# Altium PCB COMS0009_Coms_Test_Board.PcbDoc
Units mil, origin at the board's own origin, x right, y up, seen from the top; angles counter-clockwise.
Board outline 3543.31 x 3543.31 mil, 2 copper layers (Top Layer, Bottom Layer); 70 components, 93 nets, 342 pads, 87 vias.
Unrouted connection lines stored in the file: 3.
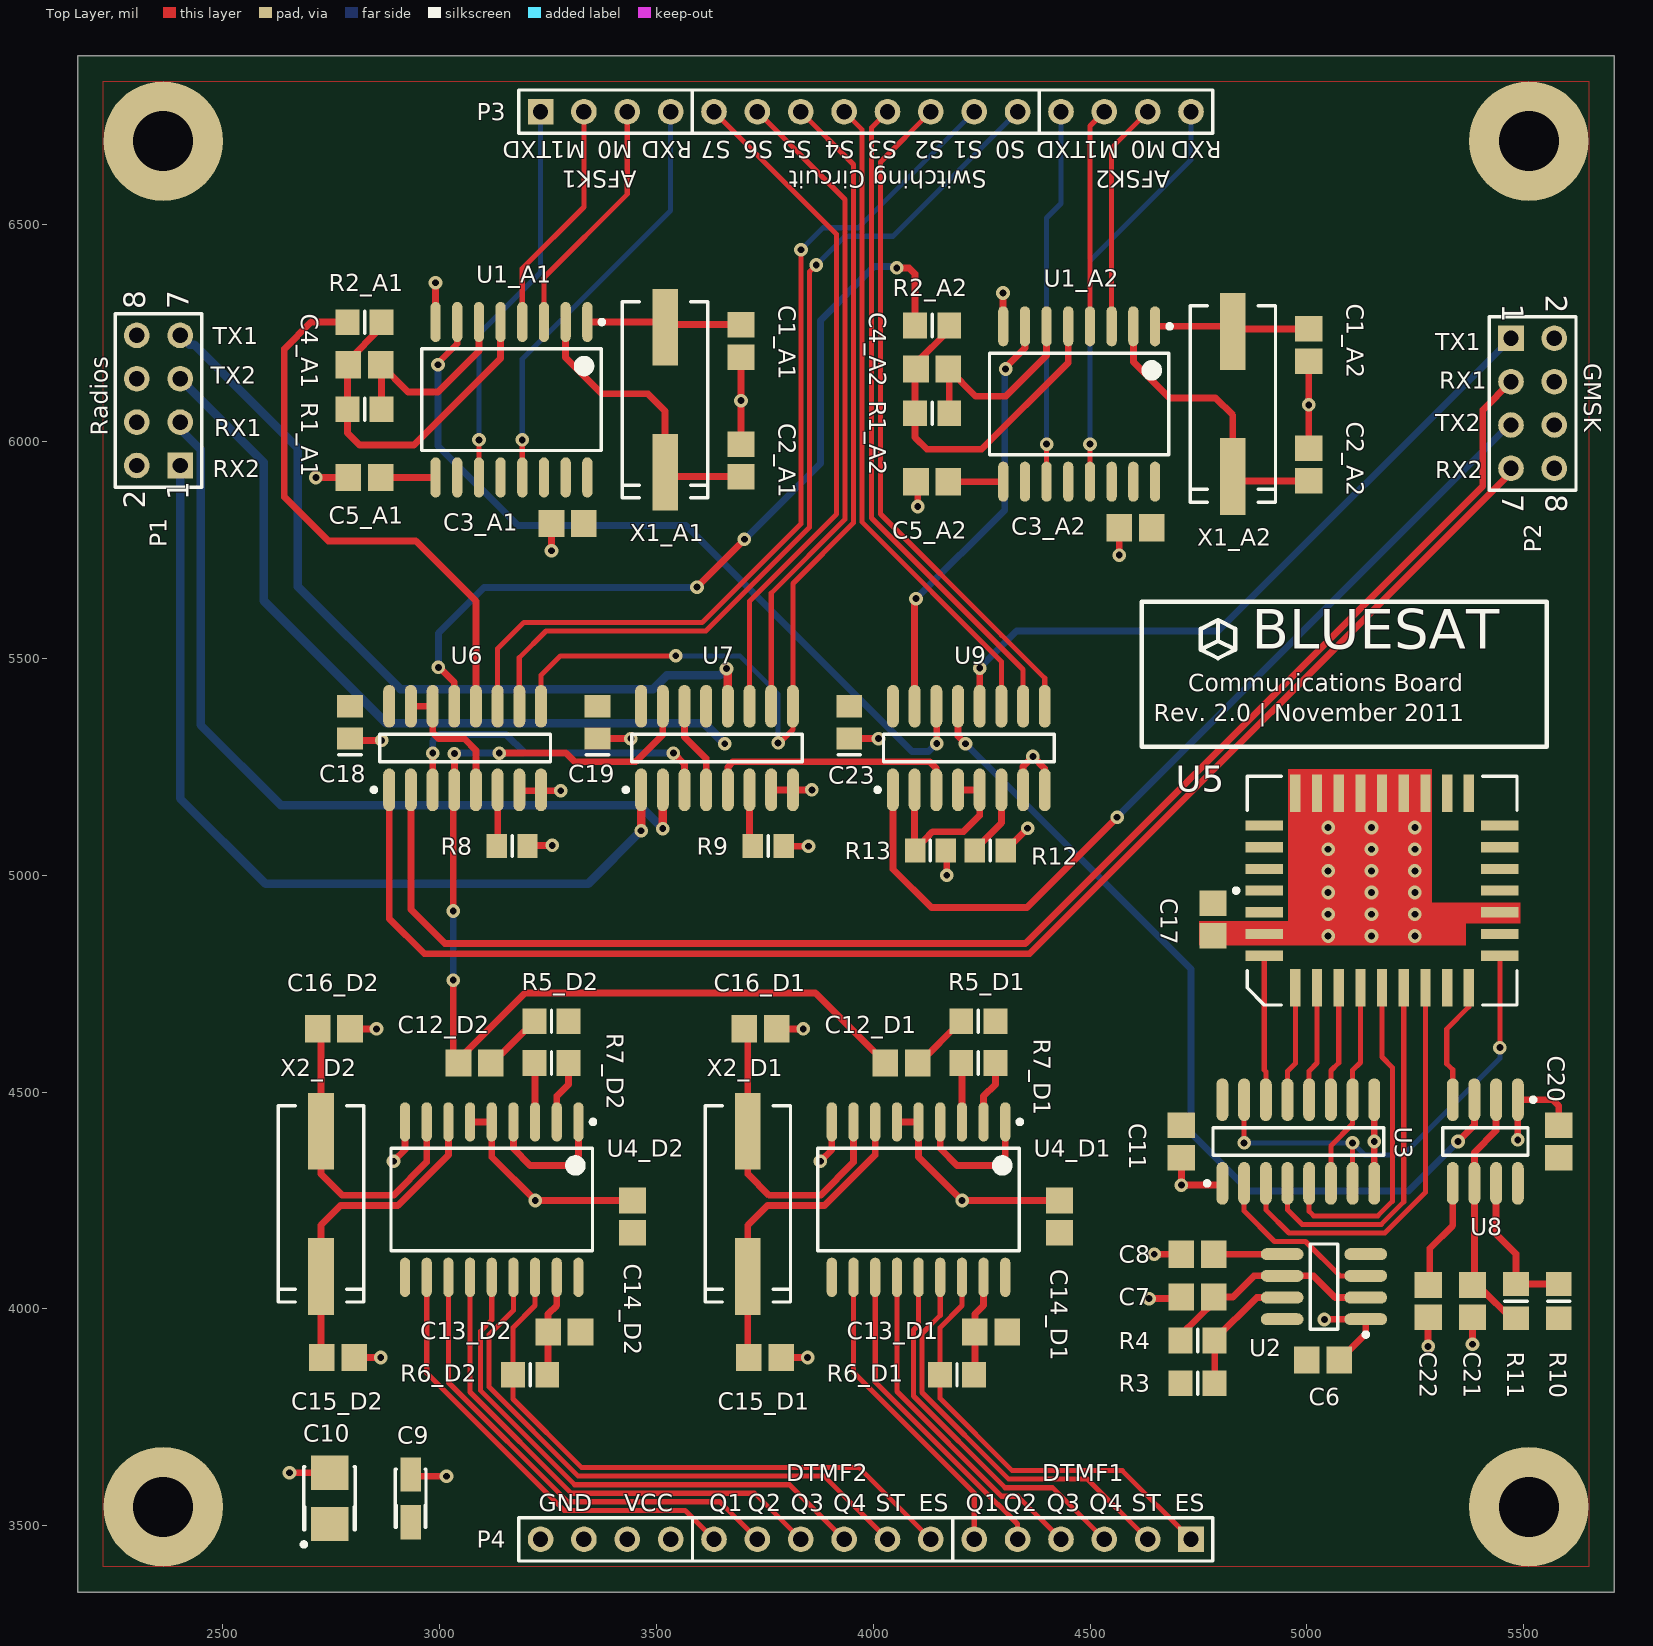
[diagram p0: Top Layer view]
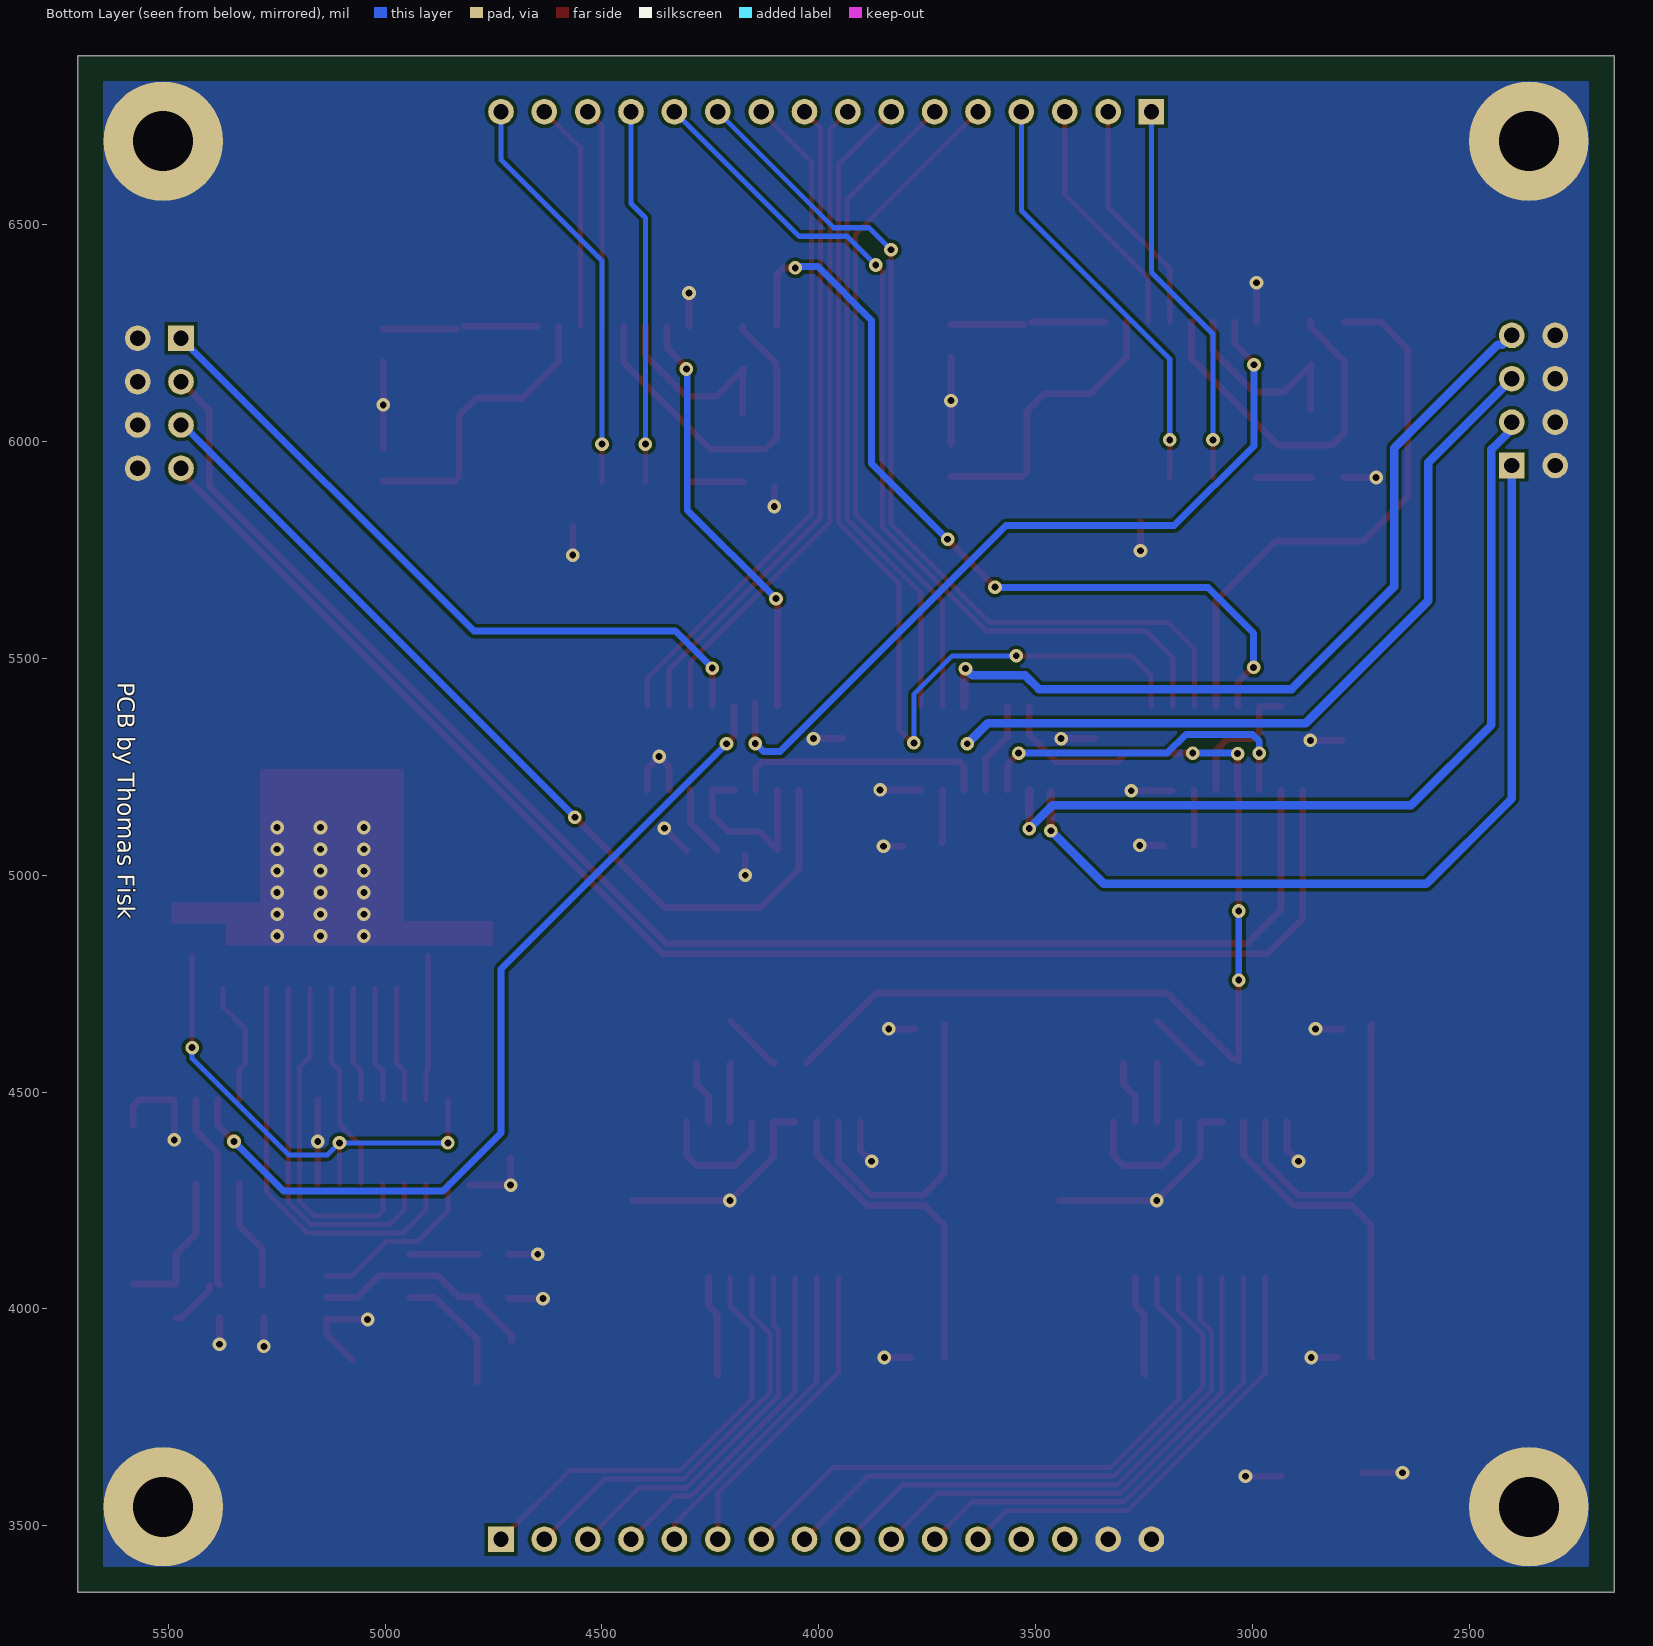
[diagram p1: Bottom Layer view, seen from below]

## Layer stack, top to bottom
Top Layer: signal copper 1.4
Dielectric: dielectric 12.6, FR-4, Dk 4.8
Bottom Layer: signal copper 1.4

## Board outline
2165.35,6889.76 5708.66,6889.76 5708.66,3346.46 2165.35,3346.46

## Design rules (kind name [scope] priority, off if disabled: settings)
AssemblyTestPointUsage [All] p1 off:
AssemblyTestpoint [All] p1 off: testpointundercomponent=TRUE minsize=40 maxsize=100 preferedsize=60 minholesize=0 maxholesize=40 preferedholesize=32 testpointgrid=1 usegrid=TRUE gridtolerance=0.01 allowsidetop=TRUE allowsidebottom=TRUE
Clearance [All] p1: gap=7.87
FabricationTestPointUsage [All] p1 off: valid=0 allowmultiple=FALSE
FabricationTestpoint [All] p1 off: side=3 testpointundercomponent=TRUE minsize=40 maxsize=100 preferedsize=60 minholesize=0 maxholesize=40 preferedholesize=32 testpointgrid=1 allowsidetop=TRUE allowsidebottom=TRUE usegrid=TRUE gridtolerance=0.01
HoleSize [All] p1: absolutevalues=TRUE maxlimit=236.22 minlimit=1 maxpercent=80.000 minpercent=20.000
MinimumSolderMaskSliver [All] p1: minsoldermaskwidth=7.48
PlaneConnect [All] p1: planeconnectstyle=Direct reliefexpansion=20 reliefentries=4 reliefconductorwidth=10 reliefairgap=10
PolygonConnect [All] p1: connectstyle=Direct reliefconductorwidth=10 reliefentries=4 polygonreliefangle="45 Angle"
RoomDefinition Switching_Circuit [InComponentClass('Components Class 1')] p1: confinementstyle=ConfineIn formatcopy=TRUE lockcomponents=FALSE outline 4507.48,4994.09 2700.39,4994.09 2700.39,5576.77 4507.48,5576.77
RoomDefinition D2 [InComponentClass('D2')] p2: confinementstyle=ConfineIn formatcopy=TRUE lockcomponents=FALSE outline 2608.27,3740.16 3582.68,3740.16 3582.68,4793.31 2608.27,4793.31
RoomDefinition D1 [InComponentClass('D1')] p3: confinementstyle=ConfineIn formatcopy=TRUE lockcomponents=FALSE outline 3592.52,3740.16 4566.93,3740.16 4566.93,4793.31 3592.52,4793.31
RoomDefinition Beacon [InComponentClass('Beacon')] p4: confinementstyle=ConfineIn formatcopy=TRUE lockcomponents=FALSE outline 4551.18,3740.16 5722.24,3740.16 5722.24,5275.59 4551.18,5275.59
RoomDefinition A2 [InComponentClass('A2')] p5: confinementstyle=ConfineIn formatcopy=TRUE lockcomponents=FALSE outline 3946.85,5698.82 5159.45,5698.82 5159.45,6446.85 3946.85,6446.85
RoomDefinition A1 [InComponentClass('A1')] p6: confinementstyle=ConfineIn formatcopy=TRUE lockcomponents=FALSE outline 2637.8,5708.66 3850.39,5708.66 3850.39,6456.69 2637.8,6456.69
RoutingVias [All] p1: holewidth=15.75 width=31.5 viastyle="Through Hole" minholewidth=15.75 minwidth=31.5 maxholewidth=15.75 maxwidth=31.5
SilkToSilkClearance [All] p1 off: silktosilkclearance=7.72
SilkscreenOverComponentPads [All] p1 off: minsilkscreentomaskgap=7.48
SolderMaskExpansion [All] p1: expansion=4
UnConnectedPin [All] p1 off:
Width [All] p1: maxlimit=39.37 minlimit=7.87 preferedwidth=7.87
19 further rules are at their usual default settings.

## Classes and differential pairs
component class A1: C1_A1 C2_A1 C3_A1 C4_A1 C5_A1 R1_A1 R2_A1 U1_A1 X1_A1
component class A2: C1_A2 C2_A2 C3_A2 C4_A2 C5_A2 R1_A2 R2_A2 U1_A2 X1_A2
component class COMS0010_Comms_Test_Board: C9 C10 P1 P2 P3 P4
component class D1: C12_D1 C13_D1 C14_D1 C15_D1 C16_D1 R5_D1 R6_D1 R7_D1 U4_D1 X2_D1
component class D2: C12_D2 C13_D2 C14_D2 C15_D2 C16_D2 R5_D2 R6_D2 R7_D2 U4_D2 X2_D2
net class ADDRESS[7..0]: ADDRESS0 ADDRESS1 ADDRESS2 ADDRESS3 ADDRESS4 ADDRESS5 ADDRESS6 ADDRESS7
net class SWC[7..0]: SWC0 SWC1 SWC2 SWC3 SWC4 SWC5 SWC6 SWC7
component class Beacon: C6 C7 C8 C11 C17 C20 C21 C22 R3 R4 R10 R11 U2 U3 U5 U8
channel class COMS0002_AFSK: A1 A2
channel class COMS0003_DTMF: D1 D2
component class U_ModemRXMux: C18 R8 U6
component class U_RadioMux: C19 R9 U7
component class U_TXDevMux: C23 R12 R13 U9

## Components (designator, comment, footprint, x,y, rotation, side; value= is the part's Value field where it differs from the comment)
C1_A1 "Cap" CAPC2012M 3694.88,6232.28 r90 top (schematic designator C1)
C1_A2 "Cap" CAPC2012M 5003.94,6222.44 r90 top (schematic designator C1)
C2_A1 "Cap" CAPC2012M 3694.88,5956.69 r270 top (schematic designator C2)
C2_A2 "Cap" CAPC2012M 5003.94,5946.85 r270 top (schematic designator C2)
C3_A1 "Cap" CAPC2012M 3295.28,5811.02 r180 top (schematic designator C3)
C3_A2 "Cap" CAPC2012M 4604.33,5801.18 r180 top (schematic designator C3)
C4_A1 "Cap" CAPC2012M 2826.77,6177.17 r180 top (schematic designator C4)
C4_A2 "Cap" CAPC2012M 4135.83,6167.32 r180 top (schematic designator C4)
C5_A1 "Cap" CAPC2012M 2826.77,5917.32 r0 top (schematic designator C5)
C5_A2 "Cap" CAPC2012M 4135.83,5907.48 r0 top (schematic designator C5)
C6 "C0805" CAPC2012M 5037.2,3881.89 r180 top
C7 "Cap1u" CAPC2012M 4747.83,4027.56 r0 top
C8 "Cap" CAPC2012M 4747.83,4125.98 r0 top
C9 "T491A" A 2933.07,3562.99 r90 top
C10 "T491B" B 2746.06,3562.99 r90 top
C11 "C0805" CAPC2012M 4710.43,4385.83 r90 top
C12_D1 "Cap" CAPC2012M 4064.96,4566.93 r180 top (schematic designator C12)
C12_D2 "Cap" CAPC2012M 3080.71,4566.93 r180 top (schematic designator C12)
C13_D1 "Cap" CAPC2012M 4271.65,3946.85 r0 top (schematic designator C13)
C13_D2 "Cap" CAPC2012M 3287.4,3946.85 r0 top (schematic designator C13)
C14_D1 "Cap" CAPC2012M 4429.13,4212.6 r90 top (schematic designator C14)
C14_D2 "Cap" CAPC2012M 3444.88,4212.6 r90 top (schematic designator C14)
C15_D1 "Cap" CAPC2012M 3750,3887.8 r0 top (schematic designator C15)
C15_D2 "Cap" CAPC2012M 2765.75,3887.8 r0 top (schematic designator C15)
C16_D1 "Cap" CAPC2012M 3740.16,4645.67 r0 top (schematic designator C16)
C16_D2 "Cap" CAPC2012M 2755.91,4645.67 r0 top (schematic designator C16)
C17 "C0805" CAPC2012M 4783.46,4897.64 r90 top
C18 "C1210" 0805 2793.11,5352.36 r90 top
C19 "C1210" 0805 3363.98,5352.36 r90 top
C20 "C0805" CAPC2012M 5580.51,4385.83 r270 top
C21 "Cap" CAPC2012M 5381.69,4017.72 r90 top
C22 "Cap" CAPC2012M 5279.33,4017.72 r90 top
C23 "C1210" 0805 3944.68,5352.36 r90 top
P1 "Header 4X2" HDR2X4 2401.57,5944.88 r90 top
P2 "Header 4X2" HDR2X4 5470.47,6238.2 r270 top
P3 "Header 16" HDR1X16 3232.68,6760.63 r0 top
P4 "Header 16" HDR1X16 4732.68,3468.5 r180 top
R1_A1 "Res1" RESC2012M 2826.77,6074.8 r180 top (schematic designator R1)
R1_A2 "Res1" RESC2012M 4135.83,6064.96 r180 top (schematic designator R1)
R2_A1 "Res1" RESC2012M 2826.77,6275.59 r0 top (schematic designator R2)
R2_A2 "Res1" RESC2012M 4135.83,6267.72 r0 top (schematic designator R2)
R3 "Res2" RESC2012M 4747.83,3828.74 r180 top
R4 "Res1" RESC2012M 4747.83,3927.17 r0 top
R5_D1 "Res1" RESC2012M 4242.13,4663.39 r180 top (schematic designator R5)
R5_D2 "Res1" RESC2012M 3257.87,4663.39 r180 top (schematic designator R5)
R6_D1 "Res1" RESC2012M 4192.91,3848.43 r0 top (schematic designator R6)
R6_D2 "Res1" RESC2012M 3208.66,3848.43 r0 top (schematic designator R6)
R7_D1 "Res1" RESC2012M 4242.13,4566.93 r0 top (schematic designator R7)
R7_D2 "Res1" RESC2012M 3257.87,4566.93 r0 top (schematic designator R7)
R8 "Res1" RESC2012N 3167.13,5066.93 r180 top
R9 "Res1" RESC2012N 3757.68,5066.93 r0 top
R10 "Res2" RESC2012M 5580.51,4017.72 r270 top
R11 "Res1" RESC2012M 5482.09,4017.72 r90 top
R12 "Res1" RESC2012N 4269.49,5057.09 r180 top
R13 "Res1" RESC2012N 4131.69,5057.09 r180 top
U1_A1 "MX614" SOIC127P1030X270-16N 3165.55,6096.46 r270 top (schematic designator U1)
U1_A2 "MX614" SOIC127P1030X270-16N 4474.61,6086.61 r270 top (schematic designator U1)
U2 "TLC555CD" D008_M 5039.17,4051.18 r180 top
U3 "HCC4520BF" SOIC16_M 4980.12,4385.83 r90 top
U4_D1 "MT88L70AS" SOIC18_N 4104.33,4251.97 r270 top (schematic designator U4)
U4_D2 "MT88L70AS" SOIC18_N 3120.08,4251.97 r270 top (schematic designator U4)
U5 "M28LV64-300XK1" PLCC32 5173.23,4964.57 r90 top
U6 "CD4053BCM" M16A_M 3058.66,5293.31 r90 top
U7 "CD4053BCM" M16A_M 3639.57,5293.31 r90 top
U8 "TLC555CD" D008_M 5411.22,4385.83 r270 top
U9 "CD4051BCM" M16A_M 4220.28,5293.31 r90 top
X1_A1 "3.579545 MHz" CSM-7 3519.88,6096.46 r90 top (schematic designator X1)
X1_A2 "3.579545 MHz" CSM-7 4828.94,6086.61 r90 top (schematic designator X1)
X2_D1 "3.579545 MHz" CSM-7 3710.63,4242.13 r90 top (schematic designator X2)
X2_D2 "3.579545 MHz" CSM-7 2726.38,4242.13 r90 top (schematic designator X2)

## Footprints (in the part's own frame and the unit in brackets; to place one, negate y for a bottom-side part, rotate by r counter-clockwise, add the part's x,y. Pads: shape width x height; smd on the part's side, far side on the other; paste and mask are expansions set on the pad)
0805 [mm] "Chip Capacitor; Body 2.0 x 1.2 mm (LxW typ)"
  rect 1.3x1.5 smd: 1(-0.95,0) 2(0.95,0)
  silkscreen extent -1.9,-0.65 -1.9,0.65
A [mm] "Capacitor, SM Tantalum; Body 3.2 x 1.6 mm (LxW typ)"
  rect 2x1.2 smd: 1(-1.4,0) 2(1.4,0)
  silkscreen extent -1.7,-0.9 1.7,0.9
B [mm] "Capacitor, SM Tantalum; Body 3.5 x 2.8 mm (LxW typ)"
  rect 2x2.2 smd: 1(-1.5,0) 2(1.5,0)
  silkscreen extent -2.82,-1.5 1.85,1.62
CAPC2012M [mm] "Chip Capacitor, Body 2.0x1.3mm, IPC Low Density"
  rect 1.5x1.6 smd: 1(-0.95,0) 2(0.95,0)
  body extent -1.1,-0.72 1.1,0.72, height 1.1
CSM-7 [mm] "Quartz Crystal, SM; 2 Leads; Body 11.4 x 4.8 x 5 mm (LxWxH)"
  rect 4.5x1.5 smd: 1(-4.25,0) 2(4.25,0)
  silkscreen extent -5.75,-2.5 5.75,2.5
D008_M [mm] "SOIC, 8-Leads, Body 4.9x3.9mm, Pitch 1.27mm, IPC Low Density"
  oval 2.5x0.7 smd: 1(-2.45,1.905) 2(-2.45,0.635) 3(-2.45,-0.635) 4(-2.45,-1.905) 5(2.45,-1.905) 6(2.45,-0.635) 7(2.45,0.635) 8(2.45,1.905)
  silkscreen extent -2.58,-2.5 0.8,2.93, body extent -2,-2.5 2,2.5, height 1.75
HDR1X16 [mm] "Connector; Header; 16 Position"
  rect 1.5x1.5 hole 0.9: 1(0,0)
  round 1.5 hole 0.9: 2(2.54,0) 3(5.08,0) 4(7.62,0) 5(10.16,0) 6(12.7,0) 7(15.24,0) 8(17.78,0) 9(20.32,0) 10(22.86,0) 11(25.4,0) 12(27.94,0) 13(30.48,0) 14(33.02,0) 15(35.56,0) 16(38.1,0)
  silkscreen extent -1.27,-1.27 39.37,1.27
HDR2X4 [mm] "Connector; Header; 4x2 Position"
  rect 1.5x1.5 hole 0.9: 1(0,0)
  round 1.5 hole 0.9: 2(0,2.54) 3(2.54,0) 4(2.54,2.54) 5(5.08,0) 6(5.08,2.54) 7(7.62,0) 8(7.62,2.54)
  silkscreen extent -1.27,-1.27 8.89,3.81
M16A_M [mm] "SOIC, 16-Leads, Body 9.9x3.9mm, Pitch 1.27mm, IPC Low Density"
  oval 2.5x0.7 smd: 1(-2.45,4.445) 2(-2.45,3.175) 3(-2.45,1.905) 4(-2.45,0.635) 5(-2.45,-0.635) 6(-2.45,-1.905) 7(-2.45,-3.175) 8(-2.45,-4.445) 9(2.45,-4.445) 10(2.45,-3.175) 11(2.45,-1.905) 12(2.45,-0.635) 13(2.45,0.635) 14(2.45,1.905) 15(2.45,3.175) 16(2.45,4.445)
  silkscreen extent -2.57,-5 0.8,5.47, body extent -2,-5 2,5, height 1.75
PLCC32 [mm] "Leaded Chip Carrier; 32 Leads; Body 11.5 x 14 mm"
  rect 0.6x2.2 smd: 1(0,6.9) 2(-1.27,6.9) 3(-2.54,6.9) 4(-3.81,6.9) 14(-3.81,-6.9) 15(-2.54,-6.9) 16(-1.27,-6.9) 17(0,-6.9) 18(1.27,-6.9) 19(2.54,-6.9) 20(3.81,-6.9) 30(3.81,6.9) 31(2.54,6.9) 32(1.27,6.9)
  rect 2.2x0.6 smd: 5(-5.7,5.08) 6(-5.7,3.81) 7(-5.7,2.54) 8(-5.7,1.27) 9(-5.7,0) 10(-5.7,-1.27) 11(-5.7,-2.54) 12(-5.7,-3.81) 13(-5.7,-5.08) 21(5.7,-5.08) 22(5.7,-3.81) 23(5.7,-2.54) 24(5.7,-1.27) 25(5.7,0) 26(5.7,1.27) 27(5.7,2.54) 28(5.7,3.81) 29(5.7,5.08)
  silkscreen extent -6.7,-7.9 6.7,8.67
RESC2012M [mm] "Chip Resistor, Body 2.0x1.3mm, IPC Low Density"
  rect 1.4x1.5 smd: 1(-1,0) 2(1,0)
  silkscreen extent 0,-0.65 0,0.65, body extent -1.07,-0.7 1.07,0.7, height 0.65
RESC2012N [mm] "Chip Resistor, Body 2.0x1.3mm, IPC Medium Density"
  rect 1.2x1.4 smd: 1(-0.9,0) 2(0.9,0)
  silkscreen extent 0,-0.6 0,0.6, body extent -1.07,-0.7 1.07,0.7, height 0.65
SOIC16_M [mm] "SOIC, 16-Leads, Body 9.9x3.9mm, Pitch 1.27mm, IPC Low Density"
  oval 2.5x0.7 smd: 1(-2.45,4.445) 2(-2.45,3.175) 3(-2.45,1.905) 4(-2.45,0.635) 5(-2.45,-0.635) 6(-2.45,-1.905) 7(-2.45,-3.175) 8(-2.45,-4.445) 9(2.45,-4.445) 10(2.45,-3.175) 11(2.45,-1.905) 12(2.45,-0.635) 13(2.45,0.635) 14(2.45,1.905) 15(2.45,3.175) 16(2.45,4.445)
  silkscreen extent -2.57,-5 0.8,5.47, body extent -2,-5 2,5, height 1.91
SOIC18_N [mm] "SOIC, 18-Leads, Body 11.6x7.6mm, Pitch 1.27mm, IPC Medium Density"
  oval 2.3x0.6 smd: 1(-4.55,5.08) 2(-4.55,3.81) 3(-4.55,2.54) 4(-4.55,1.27) 5(-4.55,0) 6(-4.55,-1.27) 7(-4.55,-2.54) 8(-4.55,-3.81) 9(-4.55,-5.08) 10(4.55,-5.08) 11(4.55,-3.81) 12(4.55,-2.54) 13(4.55,-1.27) 14(4.55,0) 15(4.55,1.27) 16(4.55,2.54) 17(4.55,3.81) 18(4.55,5.08)
  silkscreen extent -4.67,-5.9 3,6.06, body extent -3.8,-5.95 3.8,5.95, height 2.65
SOIC127P1030X270-16N [mm] "SOIC, 16-Leads, Body 10.5x7.6mm (max), Pitch 1.27mm, IPC Medium Density"
  oval 2.35x0.6 smd: 1(-4.55,4.445) 2(-4.55,3.175) 3(-4.55,1.905) 4(-4.55,0.635) 5(-4.55,-0.635) 6(-4.55,-1.905) 7(-4.55,-3.175) 8(-4.55,-4.445) 9(4.55,-4.445) 10(4.55,-3.175) 11(4.55,-1.905) 12(4.55,-0.635) 13(4.55,0.635) 14(4.55,1.905) 15(4.55,3.175) 16(4.55,4.445)
  silkscreen extent -4.67,-5.25 2.97,5.42, body extent -3.8,-5.25 3.8,5.25, height 2.7

## Part data
C1_A1 C1_A2 C2_A1 C2_A2 C3_A1 C3_A2 C4_A1 C4_A2 C5_A1 C5_A2 C8 C12_D1 C12_D2 C13_D1 C13_D2 C14_D1 C14_D2 C15_D1 C15_D2 C16_D1 C16_D2 C21 C22: "Capacitor"
C6 C7 C11 C17 C18 C19 C20 C23: library part Cap, "Capacitor"
C9 C10: "Solid Tantalum Chip Capacitor, Standard T491 Series - Industrial Grade"
P1 P2: "Header, 4-Pin, Dual row"
P3 P4: "Header, 16-Pin"
R1_A1 R1_A2 R2_A1 R2_A2 R4 R5_D1 R5_D2 R6_D1 R6_D2 R7_D1 R7_D2 R11: "Resistor"
R3 R10: library part Res1, "Resistor"
R8 R9 R12 R13: library part Res2, "Resistor"
U1_A1 U1_A2: "Bell 202 Compatible Modem"
U2 U8: "LinCMOS Timer"
U3: "Dual Binary Up-Counter"
U4_D1 U4_D2: "3 Volt Integrated DTMF Receiver"
U5: "64K (8K x 8) Low-Voltage Parallel EEPROM with Software Data Protection"
U6 U7: "Triple 2-Channnel Analog Multiplexer/Demutiplexer"
U9: "8-Channel Analog Multiplexer/Demultiplexer"
X1_A1 X1_A2 X2_D1 X2_D2: library part ECS-110-S-5P, "Crystal Oscillator"

## Free pads (board coordinates)
  round 275.59 hole 137.8: 0(2362.2,3543.31) 0(2362.2,6692.91) 0(5511.81,3543.31) 0(5511.81,6692.91)

## Via types
v1: diameter 31.5, hole 15.75, Top Layer to Bottom Layer, 86 vias
v2: diameter 31.5, hole 15.75, Top Layer to Bottom Layer, tented top, 1 vias

## Nets (pads, with @x,y where several pads share a name; then routed paths per layer and width w, separated by ;. In a path a pad name is that pad's centre, name@x,y a point inside that pad or via, vN(x,y) a via of type N, cw(c..) or ccw(c..) an arc to the next point about the centre after c; other vN are vias at no path point)
ADDRESS0: U3.3 U5.11 | length 961.2
  Top Layer w11.81: U3.3 4905.12,4228.34 4958.26,4175.2 5179.5,4175.2 5273.23,4268.93 U5.11
ADDRESS1: U3.4 U5.10 | length 857.9
  Top Layer w11.81: U3.4 4955.12,4228.34 4988.58,4194.88 5171.34,4194.88 5223.23,4246.77 U5.10
ADDRESS2: U3.5 U5.9 | length 776.1
  Top Layer w11.81: U3.5 5005.12,4225 5015.55,4214.57 5163.19,4214.57 5196.85,4248.23 5196.85,4556.89 5173.23,4580.51 U5.9
ADDRESS3: U3.6 U3.10 U5.8 | length 479
  Top Layer w11.81: U3.6 5055.12,4376.18 5105.12,4426.18 U3.10 5105.12,4550.2 5123.23,4568.31 U5.8
ADDRESS4: U3.11 U5.7 | length 265.4
  Top Layer w11.81: U3.11 5055.12,4549.41 5073.23,4567.52 U5.7
ADDRESS5: U3.12 U5.6 | length 265.4
  Top Layer w11.81: U3.12 5005.12,4548.62 5023.23,4566.73 U5.6
ADDRESS6: U3.13 U5.5 | length 265.4
  Top Layer w11.81: U3.13 4955.12,4547.83 4973.23,4565.94 U5.5
ADDRESS7: U3.14 U5.4 | length 333.8
  Top Layer w11.81: U5.4 4901.57,4550.59 4905.12,4547.05 U3.14
AF: U8.3 U9.13 | length 2037.6
  Top Layer w15.75: U9.13 4195.28,5320.47 v1(4212.6,5303.15) ; v1(5348.23,4385.83) 5386.22,4423.82 U8.3
  Bottom Layer w15.75: v1(4212.6,5303.15) 4732.28,4783.46 4732.28,4405.51 4866.14,4271.65 5234.06,4271.65 v1(5348.23,4385.83)
AFSK1_M0: P3.3 U1_A1.3 | length 564.6
  Top Layer w11.81: U1_A1.3 3240.55,6378.35 3432.68,6570.47 P3.3
AFSK1_M1: P3.2 U1_A1.4 | length 543.9
  Top Layer w11.81: U1_A1.4 3190.55,6399.06 3332.68,6541.18 P3.2
AFSK1_RX: R2_A1.1 U6.12 | length 1296.4
  Top Layer w15.75: R2_A1.1 2703.74,6275.59 2641.73,6213.58 2641.73,5872.05 2743.11,5770.67 2944.88,5770.67 3083.66,5631.89 U6.12
AFSK1_RXD: P3.4 U1_A1.13 | length 985
  Top Layer w11.81: U1_A1.13 v1(3190.55,6003.94)
  Bottom Layer w11.81: v1(3190.55,6003.94) 3190.55,6190.55 3532.68,6532.68 P3.4
AFSK1_TX: U1_A1.7 U9.14 | length 1849.8
  Top Layer w15.75: v1@2992.13,6177.17 3040.55,6225.59 U1_A1.7 ; v1(4146.26,5303.74) U9.14@4146.26,5398.03
  Bottom Layer w15.75: v1(2996.06,6177.17) 2996.06,5990.16 3180.12,5806.1 3567.91,5806.1 4089.02,5285 4127.52,5285 v1(4146.26,5303.74)
AFSK1_TXD: P3.1 U1_A1.11 | length 902.2
  Top Layer w11.81: U1_A1.11 v1(3090.55,6003.94)
  Bottom Layer w11.81: v1(3090.55,6003.94) 3090.55,6248.03 3232.68,6390.16 P3.1
AFSK2_M0: P3.15 U1_A2.3 | length 529.3
  Top Layer w11.81: U1_A2.3 4549.61,6677.56 P3.15
AFSK2_M1: P3.14 U1_A2.4 | length 508.6
  Top Layer w11.81: U1_A2.4 4499.61,6727.56 P3.14
AFSK2_RX: R2_A2.1 U6.13 | length 1950.2
  Top Layer w15.75: v1@2997.05,5481.3 3033.66,5444.69 U6.13 ; v1(3593.5,5664.37) v1@3702.76,5773.62 ; v1(4054.13,6400.59) 4082.68,6400.59 4096.46,6386.81 R2_A2.1
  Bottom Layer w15.75: v1(2997.05,5479.33) 2997.05,5558.05 3102.39,5663.39 v1@3593.5,5663.39 ; v1(3702.76,5774.61) 3877.95,5949.8 3877.95,6279.53 4001.97,6403.54 v1@4052.17,6403.54
AFSK2_RXD: P3.16 U1_A2.13 | length 949.7
  Top Layer w11.81: U1_A2.13 v1(4499.61,5994.09)
  Bottom Layer w11.81: v1(4499.61,5994.09) 4499.61,6416.93 4732.68,6650 P3.16
AFSK2_TX: U1_A2.7 U9.15 | length 983
  Top Layer w15.75: U9.15 4095.28,5634.65 v1(4098.43,5637.8) ; v1@4301.18,6167.32 4349.61,6215.75 U1_A2.7
  Bottom Layer w15.75: v1(4098.43,5637.8) 4303.15,5842.52 4303.15,6165.35 v1(4305.12,6167.32)
AFSK2_TXD: P3.13 U1_A2.11 | length 866.8
  Top Layer w11.81: U1_A2.11 v1(4399.61,5994.09)
  Bottom Layer w11.81: v1(4399.61,5994.09) 4399.61,6515.75 4432.68,6548.82 P3.13
COUNTER_CLK: U2.3 U3.2 | length 406.3
  Top Layer w11.81: U3.2 4855.12,4225.39 4925,4155.51 4996.85,4155.51 5076.18,4076.18 U2.3
DTMF1_EST: P4.1 R6_D1.1 U4_D1.16 | length 1014
  Top Layer w11.81: U4_D1.16 4204.33,4007.48 4153.54,3956.69 R6_D1.1 4153.54,3793.72 4320.3,3626.97 4574.21,3626.97 P4.1
DTMF1_Q1: P4.6 U4_D1.11 | length 719.6
  Top Layer w11.81: U4_D1.11 3954.33,3853.74 4232.68,3575.39 P4.6
DTMF1_Q2: P4.5 U4_D1.12 | length 740.7
  Top Layer w11.81: U4_D1.12 4004.33,3831.58 4287.68,3548.23 4288.39,3548.23 4332.68,3503.94 P4.5
DTMF1_Q3: P4.4 U4_D1.13 | length 783
  Top Layer w11.81: U4_D1.13 4054.33,3809.42 4295.83,3567.91 4333.27,3567.91 P4.4
DTMF1_Q4: P4.3 U4_D1.14 | length 855.7
  Top Layer w11.81: U4_D1.14 4104.33,3963.16 4092.52,3951.35 4092.52,3799.07 4303.99,3587.6 4413.58,3587.6 P4.3
DTMF1_STD: P4.2 U4_D1.15 | length 943.8
  Top Layer w11.81: U4_D1.15 4154.33,3985.32 4112.2,3943.19 4112.2,3807.22 4312.14,3607.28 4493.9,3607.28 P4.2
DTMF2_EST: P4.7 R6_D2.1 U4_D2.16 | length 1399.1
  Top Layer w11.81: U4_D2.16 3220.08,4007.48 3169.29,3956.69 R6_D2.1 3169.29,3792.32 3327.76,3633.86 3967.32,3633.86 P4.7
DTMF2_Q1: P4.12 U4_D2.11 | length 1042.1
  Top Layer w11.81: U4_D2.11 2970.08,3852.34 3286.99,3535.43 3565.75,3535.43 P4.12
DTMF2_Q2: P4.11 U4_D2.12 | length 1105.1
  Top Layer w11.81: U4_D2.12 3020.08,3830.18 3295.14,3555.12 3646.06,3555.12 P4.11
DTMF2_Q3: P4.10 U4_D2.13 | length 1168
  Top Layer w11.81: U4_D2.13 3070.08,3808.02 3303.29,3574.8 3726.38,3574.8 P4.10
DTMF2_Q4: P4.9 U4_D2.14 | length 1252.2
  Top Layer w11.81: U4_D2.14 3120.08,3974.69 3094.49,3949.1 3094.49,3811.45 3311.45,3594.49 3806.69,3594.49 P4.9
DTMF2_STD: P4.8 U4_D2.15 | length 1340.3
  Top Layer w11.81: U4_D2.15 3170.08,3996.85 3114.17,3940.94 3114.17,3819.6 3319.6,3614.17 3887.01,3614.17 P4.8
DTMF_RX: C12_D1.2 C12_D2.2 U6.4 U7.15 | length 2400.7
  Top Layer w15.75: C12_D2.2@3031.5,4570.87 v1(3031.5,4758.07) ; v1(3031.5,4917.32) U6.4@3031.5,5194.49 ; U6.4@3033.86,5196.85 v1(3033.86,5280.32) ; C12_D2.2@3043.31,4575.42 3196.23,4728.35 3866.14,4728.35 C12_D1.2 ; v1(3137.4,5281.5) 3290.94,5281.5 3310.63,5261.81 3452.36,5261.81 3514.57,5324.02 U7.15
  Bottom Layer w15.75: v1(3031.5,4758.07) v1(3031.5,4917.32) ; v1@3035.04,5281.5 v1(3137.4,5281.5)
GMSK1_RX: P2.3 U6.2 | length 3484.9
  Top Layer w15.75: U6.2 2933.66,4920.67 3011.81,4842.52 4350.39,4842.52 5405.51,5897.64 5405.51,6073.24 P2.3
GMSK1_TX: P2.1 U9.12 | length 1628.1
  Top Layer w15.75: U9.12 v1(4245.28,5477.56)
  Bottom Layer w15.75: v1(4245.28,5477.56) 4330.71,5562.99 4795.26,5562.99 P2.1
GMSK2_RX: P2.7 U6.1 | length 3386.2
  Top Layer w15.75: U6.1 2883.66,4899.96 2964.72,4818.9 4360.18,4818.9 5470.47,5929.19 P2.7
GMSK2_TX: P2.5 U9.1 | length 2105.6
  Top Layer w15.75: U9.1 4045.28,5013.78 4133.86,4925.2 4354.33,4925.2 v1@4562.99,5133.86
  Bottom Layer w15.75: v1(4562.19,5133.86) P2.5@5468.5,6040.17
GND: C1_A1.1 C1_A2.1 C2_A1.1 C2_A2.1 C3_A1.2 C3_A2.2 C5_A1.1 C5_A2.1 C6.1 C7.1 C8.1 C9.2 C10.2 C11.1 C14_D1.2 C14_D2.2 C15_D1.2 C15_D2.2 C16_D1.2 C16_D2.2 C17.1 C18.1 C19.1 C20.1 C21.1 C22.1 C23.1 P1.2 P1.4 P1.6 P1.8 P2.2 P2.4 P2.6 P2.8 P4.15 P4.16 pad.0 R8.1 R9.2 R12.1 R13.1 U1_A1.8 U1_A2.8 U2.1 U3.1 U3.8 U3.9 U4_D1.5 U4_D1.6 U4_D1.9 U4_D2.5 U4_D2.6 U4_D2.9 U5.3 U5.16 U5.23 U5.24 U5.25 U5.26 U5.27 U5.28 U5.29 U6.7 U6.8 U7.7 U7.8 U8.1 U9.7 U9.8 | length 4332.3
  Top Layer w15.75: v1(2653.54,3622.05) C10.2 ; v1(2714.57,5917.32) C5_A1.1 ; C18.1@2793.11,5311.02 v1(2866.14,5311.02) ; C16_D2.2 v1(2854.33,4645.67) ; C15_D2.2 v1(2864.17,3887.8) ; v1(2893.7,4340.55) 2920.08,4366.93 U4_D2.9 ; C9.2@2933.07,3614.17 v1(3015.75,3614.17) ; U1_A1.8 v1@2990.55,6370.47 ; U4_D2.6 U4_D2.5 3120.08,4350.39 v1(3220.47,4250) C14_D2.2 ; U6.7@3185.63,5194.88 U6.8@3233.86,5194.88 ; R8.1@3204.53,5068.9 v1(3259.45,5068.9) ; U6.8@3233.86,5196.85 U6.8@3233.86,5194.88 ; v1(3257.87,5748.03) C3_A1.2@3257.87,5814.96 ; v1(3279.13,5194.88) U6.8@3233.86,5194.88 ; C19.1 v1(3440.94,5314.96) ; C2_A1.1 C1_A1.1 ; U7.7 U7.8 ; C16_D1.2 v1(3838.58,4645.67) ; C15_D1.2 v1(3848.43,3887.8) ; R9.2@3805.12,5066.93 v1(3850.39,5066.93) ; U7.8@3812.99,5196.85 v1(3858.27,5196.85) ; v1(3877.95,4340.55) 3904.33,4366.93 U4_D1.9 ; C23.1 v1(4011.81,5314.96) ; U4_D1.6 U4_D1.5 4104.33,4350.39 v1(4204.72,4250) C14_D1.2 ; v1(4102.36,5850.39) C5_A2.1@4102.36,5895.67 ; v1(4169.29,5000) R13.1@4169.29,5045.28 ; U1_A2.8@4299.21,6265.75 v1(4299.21,6342.52) ; R12.1@4304.82,5057.18 v1(4355.91,5108.27) ; U9.7 4345.28,5250.98 v1(4367.91,5273.62) 4395.28,5246.26 U9.8 ; v1(4566.93,5738.19) C3_A2.2@4566.93,5805.12 ; v1(4635.83,4023.62) C7.1@4715.35,4023.62 ; v1@4645.67,4124.02 v1(4647.64,4125.98) C8.1@4715.35,4125.98 ; C11.1 v1(4710.43,4285.43) U3.1@4805.12,4285.43 ; C2_A2.1 C1_A2.1 ; v1@5041.93,3976.18 U2.1 5135.63,3942.91 C6.1 ; U3.8 U3.9 ; C22.1 v1(5279.33,3913.58) v1@5285.43,3907.48 ; v1(5381.69,3918.31) C21.1 ; v2@5486.22,4389.96 U8.1 5566.73,4482.28 5580.51,4468.5 C20.1
  other v1: 5040.16,3975.39 5155.12,4385.83 5048.82,4860 5148.82,4860 5248.82,4860 5048.82,4910 5148.82,4910 5248.82,4910 5048.82,4960 5148.82,4960 5248.82,4960 5048.82,5010 5148.82,5010 5248.82,5010 5048.82,5060 5148.82,5060 5248.82,5060 5048.82,5110 5148.82,5110 5248.82,5110 5003.94,6084.65 3694.88,6094.49 2990.55,6366.14
  other v2: 5486.02,4389.76
NetC1_A1_2: C1_A1.2 U1_A1.1 X1_A1.2 | length 336.6
  Top Layer w15.75: U1_A1.1 X1_A1.2@3508.07,6275.59 ; X1_A1.2@3525.79,6269.69 C1_A1.2
NetC1_A2_2: C1_A2.2 U1_A2.1 X1_A2.2 | length 336.6
  Top Layer w15.75: U1_A2.1 X1_A2.2@4817.13,6265.75 ; X1_A2.2@4834.84,6259.84 C1_A2.2
NetC2_A1_2: C2_A1.2 U1_A1.2 X1_A1.1 | length 668.9
  Top Layer w15.75: U1_A1.2 3290.55,6193.7 3374.02,6110.24 3480.32,6110.24 3519.88,6070.67 X1_A1.1 ; X1_A1.1@3529.72,5919.29 C2_A1.2
NetC2_A2_2: C2_A2.2 U1_A2.2 X1_A2.1 | length 668.9
  Top Layer w15.75: U1_A2.2 4599.61,6183.86 4683.07,6100.39 4789.37,6100.39 4828.94,6060.83 X1_A2.1 ; X1_A2.1@4838.78,5909.45 C2_A2.2
NetC4_A1_1: C4_A1.1 R1_A1.1 U1_A1.6 | length 458.9
  Top Layer w15.75: C4_A1.1 2927.17,6114.17 2996.06,6114.17 3090.55,6208.66 U1_A1.6 ; R1_A1.1 C4_A1.1@2866.14,6175.2
NetC4_A1_2: C4_A1.2 R1_A1.2 R2_A1.2 U1_A1.5 | length 823.6
  Top Layer w15.75: R2_A1.2@2866.14,6279.53 2866.14,6263.78 2787.4,6185.04 R1_A1.2 2787.4,6019.69 2814.96,5992.13 2940.94,5992.13 3140.55,6191.73 U1_A1.5
NetC4_A2_1: C4_A2.1 R1_A2.1 U1_A2.6 | length 458.9
  Top Layer w15.75: C4_A2.1 4236.22,6104.33 4305.12,6104.33 4399.61,6198.82 U1_A2.6 ; R1_A2.1 C4_A2.1@4175.2,6165.35
NetC4_A2_2: C4_A2.2 R1_A2.2 R2_A2.2 U1_A2.5 | length 818.2
  Top Layer w15.75: C4_A2.2@4096.46,6165.35 R1_A2.2 4096.46,6009.84 4124.02,5982.28 4250,5982.28 4449.61,6181.89 U1_A2.5 ; C4_A2.2 4098.43,6181.1 4175.2,6257.87 R2_A2.2@4175.2,6267.1
NetC5_A1_2: C5_A1.2 U1_A1.9 | length 126.4
  Top Layer w15.75: C5_A1.2 U1_A1.9
NetC5_A2_2: C5_A2.2 U1_A2.9 | length 126.4
  Top Layer w15.75: C5_A2.2 U1_A2.9
NetC7_2: C7.2 R4.1 U2.2 U2.6 | length 541.2
  Top Layer w15.75: R4.1 4708.46,3939.51 4747.3,3978.35 C7.2@4785.24,4016.28 ; C7.2@4785.24,4009.84 C7.2 ; C7.2@4785.24,4016.73 C7.2 ; U2.2 5065.16,4026.18 5015.16,4076.18 U2.6 4878.15,4076.18 4829.53,4027.56 C7.2
  Top Layer w19.68: C7.2@4785.24,4016.28 C7.2@4785.24,4016.73
NetC8_2: C8.2 U2.5 | length 157.6
  Top Layer w15.75: C8.2 4942.52,4125.98 U2.5
NetC12_D1_1: C12_D1.1 R5_D1.2 | length 140.3
  Top Layer w15.75: C12_D1.1 4106.3,4566.93 R5_D1.2
NetC12_D2_1: C12_D2.1 R5_D2.2 | length 140.3
  Top Layer w15.75: C12_D2.1 3122.05,4566.93 R5_D2.2
NetC13_D1_1: C13_D1.1 R6_D1.2 U4_D1.17 | length 233.5
  Top Layer w15.75: R6_D1.2 4234.25,3850.39 C13_D1.1 4234.25,3988.19 4254.33,4008.27 U4_D1.17
NetC13_D2_1: C13_D2.1 R6_D2.2 U4_D2.17 | length 233.5
  Top Layer w15.75: R6_D2.2 3250,3850.39 C13_D2.1 3250,3988.19 3270.08,4008.27 U4_D2.17
NetC15_D1_1: C15_D1.1 U4_D1.7 X2_D1.1 | length 743
  Top Layer w15.75: C15_D1.1@3708.66,3887.8 3710.63,3889.76 X2_D1.1 3710.63,4192.91 3755.91,4238.19 3887.74,4238.19 4004.33,4354.78 U4_D1.7
NetC15_D2_1: C15_D2.1 U4_D2.7 X2_D2.1 | length 743
  Top Layer w15.75: C15_D2.1@2724.41,3887.8 2726.38,3889.76 X2_D2.1 2726.38,4192.91 2771.65,4238.19 2903.49,4238.19 3020.08,4354.78 U4_D2.7
NetC16_D1_1: C16_D1.1 U4_D1.8 X2_D1.2 | length 733.9
  Top Layer w15.75: C16_D1.1@3708.66,4655.51 3710.63,4653.54 X2_D1.2 3710.63,4311.02 3759.84,4261.81 3877.95,4261.81 3954.33,4338.19 U4_D1.8
NetC16_D2_1: C16_D2.1 U4_D2.8 X2_D2.2 | length 733.9
  Top Layer w15.75: C16_D2.1@2724.41,4655.51 2726.38,4653.54 X2_D2.2 2726.38,4311.02 2775.59,4261.81 2893.7,4261.81 2970.08,4338.19 U4_D2.8
NetC21_2: C21.2 R11.1 U8.2 U8.6 | length 568.3
  Top Layer w15.75: C21.2@5383.66,4057.09 C21.2 5386.22,4059.65 U8.6 5386.22,4360.83 5436.22,4410.83 U8.2 ; C21.2@5404.7,4055.12 5404.7,4043.92 5470.28,3978.35 R11.1
NetC22_2: C22.2 U8.5 | length 256.2
  Top Layer w15.75: C22.2@5283.27,4055.12 5283.27,4139.76 5336.22,4192.72 U8.5
NetR3_1: R3.1 R4.2 U2.7 | length 294.1
  Top Layer w15.75: R3.1@4787.2,3830.71 4787.2,3929.13 4884.25,4026.18 U2.7
NetR5_D1_1: R5_D1.1 R7_D1.2 U4_D1.2 | length 147.1
  Top Layer w15.75: U4_D1.2 4254.33,4490.55 4281.5,4517.72 R7_D1.2
NetR5_D2_1: R5_D2.1 R7_D2.2 U4_D2.2 | length 147.1
  Top Layer w15.75: U4_D2.2 3270.08,4490.55 3297.24,4517.72 R7_D2.2
NetR7_D1_1: R7_D1.1 U4_D1.3 | length 136.5
  Top Layer w15.75: R7_D1.1 4204.33,4565.35 U4_D1.3
NetR7_D2_1: R7_D2.1 U4_D2.3 | length 136.5
  Top Layer w15.75: R7_D2.1 3220.08,4565.35 U4_D2.3
NetR8_2: R8.2 U6.6 | length 127.8
  Top Layer w15.75: R8.2@3133.86,5069.09 U6.6@3133.86,5196.85
NetR9_1: R9.1 U7.6 | length 122.2
  Top Layer w15.75: R9.1@3714.57,5074.61 U7.6
NetR10_1: R10.1 R11.2 U8.7 | length 349.7
  Top Layer w15.75: U8.7 5436.22,4172.83 5482.09,4126.97 R11.2 R10.1
NetR12_2: R12.2 U9.6 | length 163.9
  Top Layer w15.75: R12.2@4234.06,5061.02 4234.06,5059.67 4295.28,5120.89 U9.6
NetR13_2: R13.2 U9.2 U9.4 U9.5 | length 431.5
  Top Layer w15.75: U9.2 4095.28,5058.07 4127.76,5090.55 4127.76,5091.17 4136.98,5100.39 4208.27,5100.39 4245.28,5137.4 U9.5 U9.4
NetU4_D1_1: U4_D1.1 U4_D1.4 | length 314.8
  Top Layer w15.75: U4_D1.4 4154.33,4369.29 4192.91,4330.71 4281.5,4330.71 4304.33,4353.54 U4_D1.1
NetU4_D2_1: U4_D2.1 U4_D2.4 | length 314.8
  Top Layer w15.75: U4_D2.4 3170.08,4369.29 3208.66,4330.71 3297.24,4330.71 3320.08,4353.54 U4_D2.1
NetU6_3: U6.3 U7.3 | length 787
  Top Layer w15.75: U6.3@2983.86,5196.85 v1(2983.86,5281.5) ; v1(3538.98,5281.5) 3564.57,5255.91 U7.3
  Bottom Layer w15.75: v1(2983.86,5281.5) 2983.86,5309.06 2999.61,5324.8 3153.15,5324.8 3196.46,5281.5 v1(3538.98,5281.5)
NetU6_5: U6.5 U6.14 U6.15 | length 318.9
  Top Layer w15.75: U6.15@2933.86,5389.76 2983.86,5389.76 2983.86,5328.74 2997.64,5314.96 3056.69,5314.96 3083.86,5287.8 U6.5@3083.86,5196.85
NetU7_4: U7.4 U7.14 | length 213.6
  Top Layer w15.75: U7.14 3564.57,5318.9 3614.57,5268.9 U7.4
NetU7_5: U7.5 U9.3 | length 594.3
  Top Layer w15.75: U7.5 3664.57,5249.61 3676.77,5261.81 4129.53,5261.81 4145.28,5246.06 U9.3
RESET: U3.7 U3.15 U5.14 | length 1117.3
  Top Layer w11.81: v1@4855.12,4388.78 U3.15 ; U3.7 v1(5105.12,4382.87) ; v1(5444.88,4602.36) U5.14
  Bottom Layer w11.81: v1(4855.12,4382.87) v1(5105.12,4382.87) 5132.99,4355 5222,4355 5444.88,4577.88 v1(5444.88,4602.36)
RX1: P1.3 U7.2 | length 1972.1
  Top Layer w19.68: v1(3514.57,5107.48) U7.2
  Bottom Layer w19.68: P1.3 2401.57,6028.99 2448.82,5981.75 2448.82,5346.46 2633.86,5161.42 3460.63,5161.42 v1(3514.57,5107.48)
RX2: P1.1 U7.1 | length 2053.4
  Top Layer w19.68: v1(3464.57,5102.36) U7.1@3464.57,5192.91
  Bottom Layer w19.68: P1.1 2401.57,5177.17 2598.43,4980.31 3342.52,4980.31 v1(3464.57,5102.36)
SWC0: P3.12 U6.10 | length 2127.5
  Top Layer w11.81: U6.10 3183.66,5501.57 3245.08,5562.99 3613.47,5562.99 3852.85,5802.38 3852.85,6391.52 v1(3868.46,6407.13)
  Bottom Layer w11.81: v1(3868.46,6407.13) 3934.76,6473.43 4045.47,6473.43 P3.12
SWC1: P3.11 U6.11 | length 2114.6
  Top Layer w11.81: U6.11 3133.66,5522.29 3194.05,5582.68 3605.32,5582.68 3833.17,5810.53 v1(3833.17,6442.42)
  Bottom Layer w11.81: v1(3833.17,6442.42) 3883.86,6493.11 3965.16,6493.11 P3.11
SWC2: P3.10 U9.9 | length 1575.7
  Top Layer w11.81: P3.10 4016.73,6644.69 4016.73,5832.68 4296.26,5553.15 4395.28,5454.13 U9.9
SWC3: P3.9 U9.10 | length 1530.9
  Top Layer w11.81: P3.9 3995.85,6723.81 3995.85,5824.03 4345.28,5474.61 U9.10
SWC4: P3.8 U9.11 | length 1521.1
  Top Layer w11.81: P3.8 3974.28,6719.03 3974.28,5814.11 4295.28,5493.11 U9.11
SWC5: P3.7 U6.9 U7.9 | length 2365.4
  Top Layer w11.81: U6.9 3233.66,5461.02 3278.54,5505.91 v1(3544.29,5505.91) ; v1(3780.51,5305.12) 3783.46,5305.12 3814.57,5336.22 U7.9 3814.57,5672.56 3954.59,5812.58 3954.59,6638.71 P3.7
  Bottom Layer w11.81: v1(3544.29,5505.91) 3691.93,5505.91 3780.51,5417.32 v1(3780.51,5305.12)
SWC6: P3.6 U7.10 | length 1525.2
  Top Layer w11.81: P3.6 3934.91,6558.4 3934.91,5820.73 3764.57,5650.39 U7.10
SWC7: P3.5 U7.11 | length 1571
  Top Layer w11.81: P3.5 3915.22,6478.08 3915.22,5832.55 3714.57,5631.89 U7.11
TONE_ON: U5.13 U8.4 | length 284.6
  Top Layer w11.81: U8.4 5336.22,4551.38 5322.44,4565.16 5322.44,4645.67 5373.23,4696.46 U5.13
TX1: P1.7 U7.12 | length 1892.2
  Top Layer w19.68: v1(3661.42,5476.38) 3664.57,5473.23 U7.12
  Bottom Layer w19.68: P1.7 2422.83,6223.62 2434.19,6223.62 2673.23,5984.58 2673.23,5665.35 2909.45,5429.13 3492.13,5429.13 3523.62,5460.63 3645.67,5460.63 v1(3661.42,5476.38)
TX2: P1.5 U7.13 | length 1791.6
  Bottom Layer w19.68: P1.5 2594.49,5951.97 2594.49,5632.74 2853.77,5373.46 2876.83,5350.39 3610.24,5350.39 v1(3657.48,5303.15)
VCC: C3_A1.1 C3_A2.1 C6.2 C9.1 C10.1 C11.2 C13_D1.2 C13_D2.2 C14_D1.1 C14_D2.1 C17.2 C18.2 C19.2 C20.2 C23.2 P4.13 P4.14 R3.2 R10.2 U1_A1.10 U1_A1.12 U1_A1.16 U1_A2.10 U1_A2.12 U1_A2.16 U2.4 U2.8 U3.16 U4_D1.10 U4_D1.18 U4_D2.10 U4_D2.18 U5.31 U5.32 U6.16 U7.16 U8.8 U9.16
pads on no net: U1_A1.14 U1_A1.15 U1_A2.14 U1_A2.15 U5.1 U5.2 U5.12 U5.15 U5.17 U5.18 U5.19 U5.20 U5.21 U5.22 U5.30

## Polygon pours and split planes (outlines as drawn)
GND on Bottom Layer "Top Layer-No Net" (solid, remove dead copper, pour order 7): 2224.41,6830.71 5649.61,6830.71 5649.61,3405.51 2224.41,3405.51
GND on Bottom Layer "Bottom Layer-No Net" (solid, remove dead copper, pour order 6): 2362.2,6811.02 5629.92,6811.02 5629.92,3897.64 2362.2,3897.64
VCC on Top Layer "Top Layer-No Net" (solid, remove dead copper, shelved, pour order 5): 2224.41,6830.71 5649.61,6830.71 5649.61,3405.51 2224.41,3405.51

## Other copper
Top Layer:
  region net GND: 5492.13,4937.01 5492.13,4889.76 5366.14,4889.76 5366.14,4838.58 4751.97,4838.58 4751.97,4893.7 4956.69,4893.7 4956.69,5244.09 5287.4,5244.09 5287.4,4937.01

## Silkscreen, mask and mechanical layers (free items; w line width, h text height)
Top Overlay:
  lines w7.87: 3582.25,6710.63 3582.25,6810 ; 3583,3418.63 3583,3518 ; 4183,3418.63 4183,3518 ; 4383,6710.63 4383,6810
  lines w10: 4754.95,5520.31 4794.95,5500.31 4834.95,5520.31 ; 4754.95,5520.31 4754.95,5568.27 4794.95,5588.27 ; 4754.95,5520.31 4794.95,5540.31 ; 4794.95,5540.31 4794.95,5588.27 ; 4794.95,5540.31 4834.95,5520.31 ; 4794.95,5588.27 4834.95,5568.27 4834.95,5520.31 ; 4618.85,5296 4618.85,5630.87 5553.02,5630.87 5553.02,5296 4618.85,5296
  text "TXD" at 3257.87,6692.91 h39.37 r180
  text "M1" at 3336.61,6692.91 h39.37 r180
  text "M0" at 3444.88,6692.91 h39.37 r180
  text "RXD" at 3582.68,6692.91 h39.37 r180
  text "S7" at 3671.26,6692.91 h39.37 r180
  text "S6" at 3769.69,6692.91 h39.37 r180
  text "S5" at 3858.27,6692.91 h39.37 r180
  text "S4" at 3956.69,6692.91 h39.37 r180
  text "S3" at 4055.12,6692.91 h39.37 r180
  text "S2" at 4163.39,6692.91 h39.37 r180
  text "S1" at 4251.97,6692.91 h39.37 r180
  text "S0" at 4350.39,6692.91 h39.37 r180
  text "TXD" at 4488.19,6692.91 h39.37 r180
  text "M1" at 4566.93,6692.91 h39.37 r180
  text "M0" at 4675.2,6692.91 h39.37 r180
  text "RXD" at 4803.15,6692.91 h39.37 r180
  text "AFSK1" at 3454.72,6624.02 h39.37 r180
  text "Switching Circuit" at 4261.81,6624.02 h39.37 r180
  text "AFSK2" at 4685.04,6624.02 h39.37 r180
  text "TX1" at 2476.38,6224.41 h39.37
  text "TX1" at 5295.28,6210.63 h39.37
  text "GMSK" at 5639.76,6181.1 h39.37 r270
  text "TX2" at 2472.44,6133.86 h39.37
  text "RX1" at 5305.12,6122.05 h39.37
  text "TX2" at 5295.28,6023.62 h39.37
  text "Radios" at 2234.25,6013.78 h39.37 r90
  text "RX1" at 2480.32,6011.81 h39.37
  text "RX2" at 2476.38,5917.32 h39.37
  text "RX2" at 5295.28,5915.35 h39.37
  text "BLUESAT" at 4873.22,5492.44 h157.48
  text "Communications Board" at 4726.25,5424.17 h39.37
  text "Rev. 2.0 | November 2011" at 4647,5355 h39.37
  text "DTMF2" at 3799.21,3602.36 h39.37
  text "DTMF1" at 4389.76,3602.36 h39.37
  text "GND" at 3228.35,3533.46 h39.37
  text "VCC" at 3425.2,3533.46 h39.37
  text "Q1" at 3622.05,3533.46 h39.37
  text "Q2" at 3710.63,3533.46 h39.37
  text "Q3" at 3809.06,3533.46 h39.37
  text "Q4" at 3907.48,3533.46 h39.37
  text "ST" at 4005.91,3533.46 h39.37
  text "ES" at 4104.33,3533.46 h39.37
  text "Q1" at 4212.6,3533.46 h39.37
  text "Q2" at 4301.18,3533.46 h39.37
  text "Q3" at 4399.61,3533.46 h39.37
  text "Q4" at 4498.03,3533.46 h39.37
  text "ST" at 4596.46,3533.46 h39.37
  text "ES" at 4694.88,3533.46 h39.37
Bottom Overlay:
  text "PCB by Thomas Fisk" at 5616,5445 h39.37 r90
Mechanical 1:
  the board outline again, w10

## Text inside footprints (layer, text, board x,y; h text height)
P1: Top Overlay "8" at 2321.57,6304.88 h50 r90; Top Overlay "7" at 2421.57,6304.88 h50 r90; Top Overlay "1" at 2421.57,5864.88 h50 r90; Top Overlay "2" at 2321.57,5844.88 h50 r90
P2: Top Overlay "8" at 5550.47,5878.2 h50 r270; Top Overlay "7" at 5450.47,5878.2 h50 r270; Top Overlay "1" at 5450.47,6318.2 h50 r270; Top Overlay "2" at 5550.47,6338.2 h50 r270